# Altium PCB KickerTrigger.PcbDoc
Units mm, origin at the board's own origin, x right, y up, seen from the top; angles counter-clockwise.
Board outline 50.8 x 25.4 mm, 2 copper layers (Top Layer, Bottom Layer); 11 components, 8 nets, 30 pads, 19 vias.
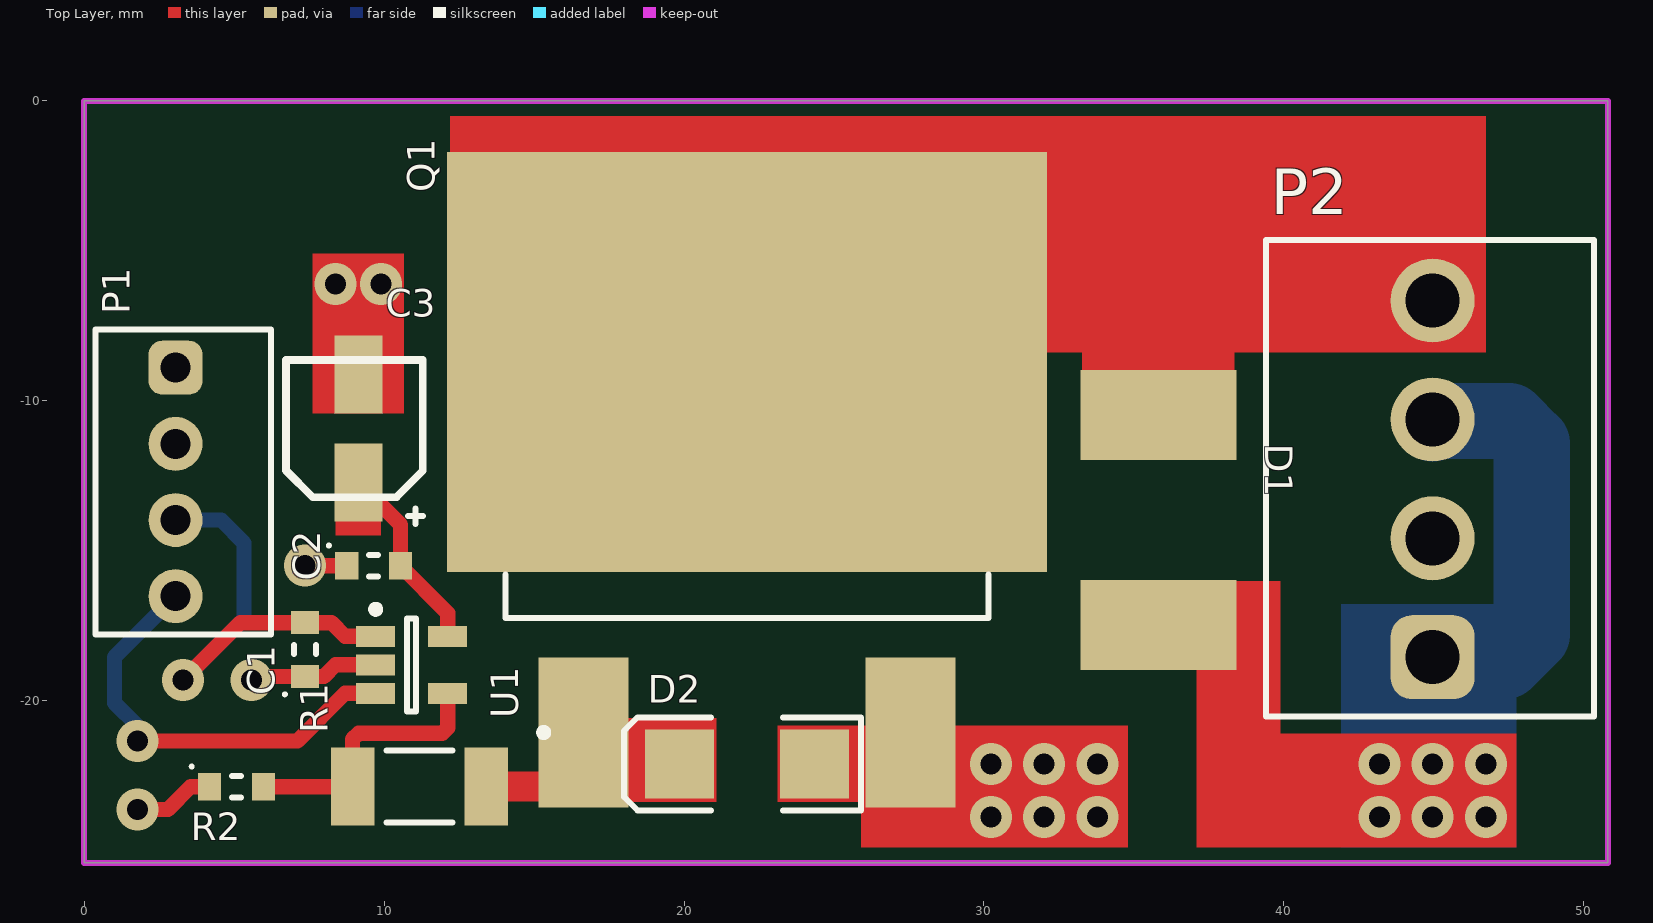
[diagram p0: Top Layer view]
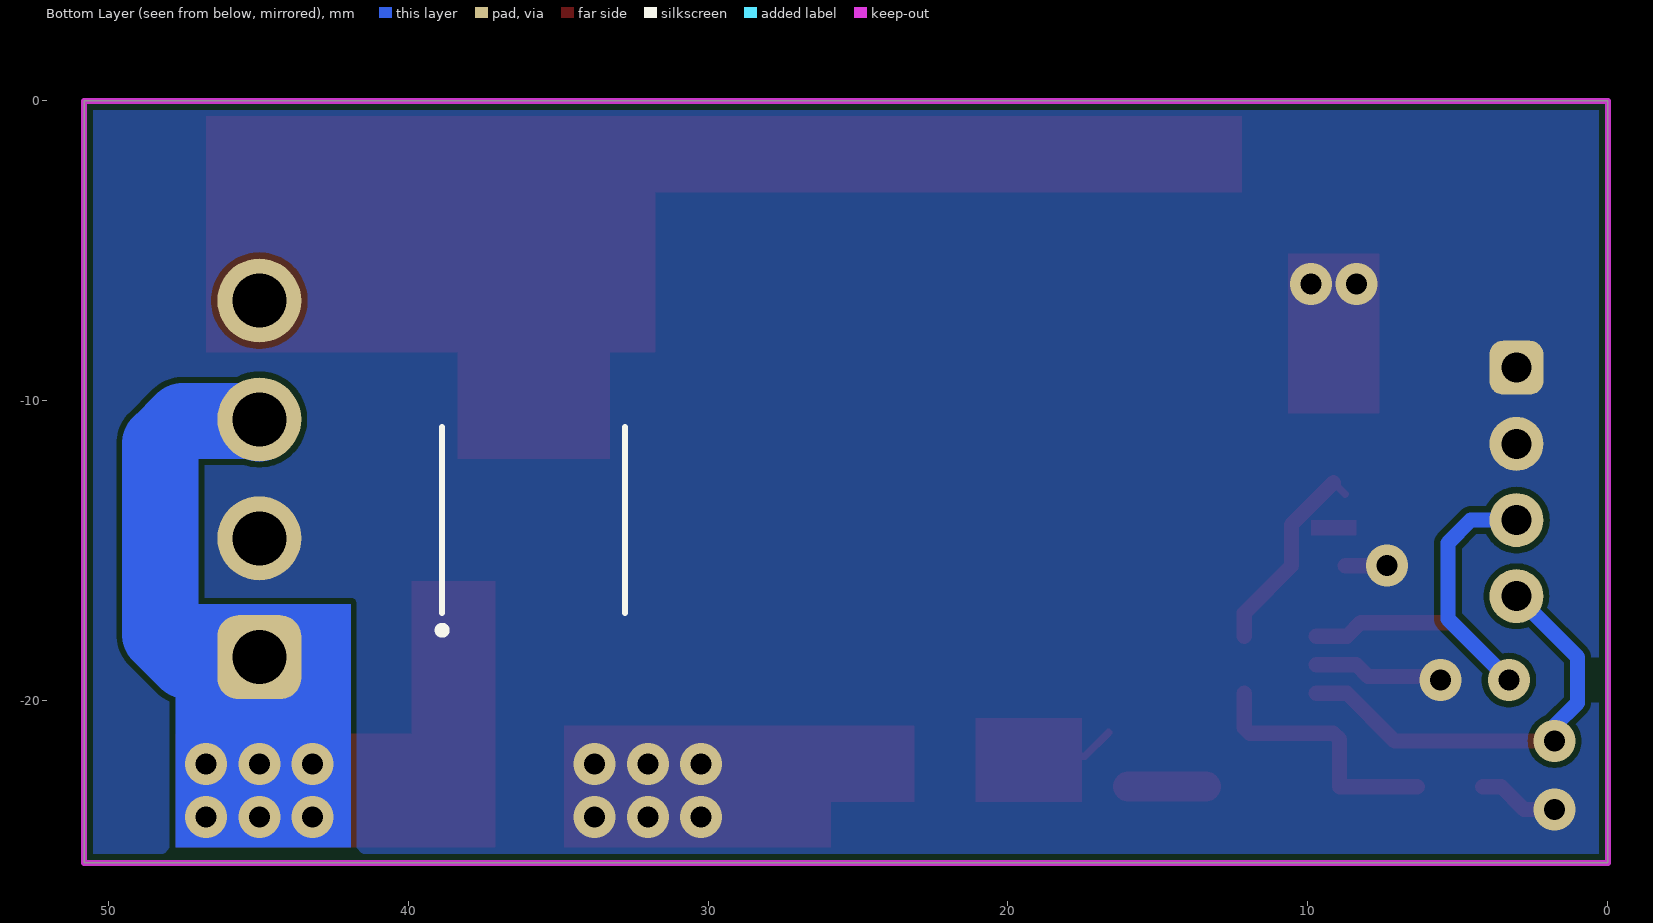
[diagram p1: Bottom Layer view, seen from below]
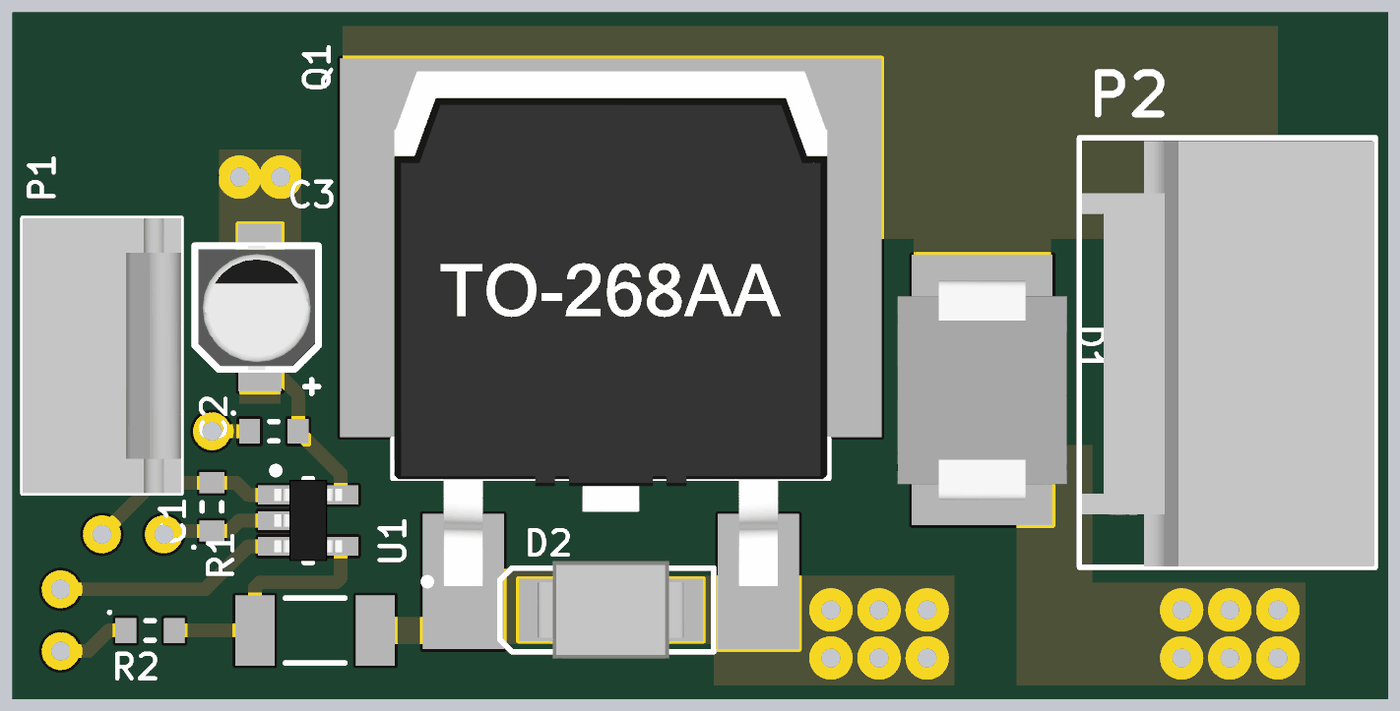
[diagram p2: 3D render of the assembled board from above, using the file's embedded part models]

## Layer stack, top to bottom
Top Solder: solder mask 0.0102, Solder Resist, Dk 3.5
Top Layer: signal copper 0.0356
Dielectric 1: dielectric 0.32, FR-4, Dk 4.8
Bottom Layer: signal copper 0.0356
Bottom Solder: solder mask 0.0102, Solder Resist, Dk 3.5

## Board outline
0,-25.4 50.8,-25.4 50.8,0 0,0

## Design rules (kind name [scope] priority, off if disabled: settings)
Clearance [All] p1: gap=0.203
PlaneClearance [All] p1: clearance=30
PlaneConnect [All] p1: planeconnectstyle=Relief reliefexpansion=0.254 reliefentries=4 reliefconductorwidth=0.508 reliefairgap=0.254
PolygonConnect [All] p1: connectstyle=Direct reliefconductorwidth=0.508 reliefentries=4 polygonreliefangle="90 Angle" airgapwidth=0.254
RoutingVias [All] p1: holewidth=0.7 width=1.4 viastyle="Through Hole" minholewidth=0.7 minwidth=1.4 maxholewidth=0.7 maxwidth=1.4
SolderMaskExpansion [All] p1: expansion=0.102
Width [All] p1: maxlimit=10 minlimit=0.254 preferedwidth=0.508
28 further rules are at their usual default settings.

## Components (designator, comment, footprint, x,y, rotation, side; value= is the part's Value field where it differs from the comment)
C1 "CL10B104KB8SFNC" 0603 7.366,-18.288 r90 top
C2 "CL10B104KB8SFNC" 0603 9.652,-15.494 r0 top
C3 "865230340001" "CAP 4.3x4.3mm" 9.144,-10.922 r270 top
D1 "S10M-TP" HSMC 35.814,-13.97 r270 top
D2 "15V, 3W" SMB 22.098,-22.098 r180 top
P1 "header 4pin 0.100" "0.100MIL 4PIN HEADER" 3.048,-8.89 r270 top
P2 "Header 4pin 0.156" "0.156mil 4pin header" 44.958,-18.542 r90 top
Q1 "IXFT94N30P3" TO-268 22.098,-12.954 r90 top
R1 "RMCP2010FT10R0" 2010 11.176,-22.86 r0 top
R2 "RC0603JR-0710KL" 0603 5.08,-22.86 r0 top
U1 "TPS2819DBVR" SOT-23-5 10.922,-18.796 r0 top

## Footprints (in the part's own frame and the unit in brackets; to place one, negate y for a bottom-side part, rotate by r counter-clockwise, add the part's x,y. Pads: shape width x height; smd on the part's side, far side on the other; paste and mask are expansions set on the pad)
"0.100MIL 4PIN HEADER" [mm]
  rrect50% 1.8x1.8 hole 1: 1(0,0)
  round 1.8 hole 1: 2(2.54,0) 3(5.08,0) 4(7.62,0)
  silkscreen extent -1.27,-2.67 8.89,3.18, body extent -1.27,-2.67 8.89,3.18, height 10.03
"0.156mil 4pin header" [mm]
  rrect50% 2.8x2.8 hole 1.8: 1(0,0)
  round 2.8 hole 1.8: 2(3.962,0) 3(7.925,0) 4(11.887,0)
  silkscreen extent -1.98,-5.38 13.9,5.55, body extent -1.95,-5.35 13.77,5.45, height 13.93
0603 [mm] "Chip 2-Leads, Body 1,60x0,80mm, IPC Medium Density"
  rect 0.77x0.92 smd: 1(-0.895,0) 2(0.895,0)
  silkscreen extent -1.54,-0.36 0.15,0.72, body extent -0.8,-0.4 0.8,0.4, height 1
2010 [mm] "Chip Resistor, 2-Leads, Body 5,00x2,45mm, IPC Medium Density"
  rect 1.45x2.6 smd: 1(-2.225,0) 2(2.225,0)
  silkscreen extent -1.1,-1.2 1.1,1.2, body extent -2.6,-1.3 2.6,1.3, height 0.6
"CAP 4.3x4.3mm" [mm] "Chip"
  rect 2.6x1.6 smd: 1(1.8,0) 2(-1.8,0)
  silkscreen extent -2.29,-2.41 3.17,2.16, body extent -2.29,-2.28 2.31,2.02, height 3.91
HSMC [mm]
  rect 3x5.2 smd: A(-3.5,0) K(3.5,0)
  body extent -4.06,-3.15 4.06,3.15, height 1.27
SMB [mm] "DO-214-AA/SMB; 2 C-Bend Leads; Body 5.3 x 3.6 mm, inc. leads (LxW)"
  rect 2.3x2.3 smd: A(-2.25,0) K(2.25,0)
  silkscreen extent -3.8,-1.55 4.1,1.55, body extent -2.7,-1.8 2.7,1.8, height 2.5
SOT-23-5 [mm]
  rect 1.3x0.7 smd: 1(-1.2,0.95) 2(-1.2,0) 3(-1.2,-0.95) 4(1.2,-0.95) 5(1.2,0.95)
  silkscreen extent -1.32,-1.55 0.15,1.97, body extent -1.25,-1.5 1.25,1.5, height 1.05
TO-268 [mm]
  rect 5x3 smd: 1(-8.1,5.45) 3(-8.1,-5.45)
  rect 14x20 smd: 2(4.25,0)
  silkscreen extent -8.22,-8.05 -2.83,8.05, body extent -8.27,-8 10.78,8, height 5.1

## Part data
C1 C2: "CAP CER 0.1UF 50V X7R 0603"
C3: "CAP 10 UF 20% 16 V"
D1: "DIODE GEN PURP 1KV 10A DO214AB"
D2: library part 3SMBJ5929B-TP, "DIODE ZENER 15V 3W DO214AA"
P1: "CONN HEADER VERT 4POS .100 TIN"
P2: "CONN HEADER VERT 4POS .156 TIN"
Q1: "MOSFET N-CH 300V 94A TO-268"
R1: "RES SMD 10 OHM 1% 1W 2010"
R2: "RES SMD 10K OHM 5% 1/10W 0603"
U1: "IC NONINVERT FET DRVR SOT-23-5"

## Via types
v1: diameter 1.4, hole 0.7, Top Layer to Bottom Layer, 19 vias

## Nets (pads, with @x,y where several pads share a name; then routed paths per layer and width w, separated by ;. In a path a pad name is that pad's centre, name@x,y a point inside that pad or via, vN(x,y) a via of type N, cw(c..) or ccw(c..) an arc to the next point about the centre after c; other vN are vias at no path point)
AGND: C1.1 C2.1 C3.2 D2.A P1.1 P1.2 P2.2 Q1.3 R2.1 U1.2 | length 17.9
  Top Layer w0.254: v1(5.588,-19.304) v1@5.709,-19.183 ; v1(8.382,-6.096) 8.382,-7.874 8.636,-8.128 8.636,-8.614 C3.2 C3.2@9.42,-9.398 ; C3.2@9.652,-8.128 9.906,-7.874 v1(9.906,-6.096) ; D2.A@24.348,-21.844 26.758,-21.844 Q1.3 ; v1@31.976,-23.396 v1@32.004,-23.368
  Top Layer w0.508: v1(1.778,-23.622) 2.794,-23.622 3.556,-22.86 R2.1 ; v1@5.709,-19.183 7.995,-19.183 8.382,-18.796 U1.2 ; v1(7.366,-15.494) C2.1
  other v1: 30.226,-23.876 32.004,-23.876 33.782,-23.876 30.226,-22.098 32.004,-22.098 33.782,-22.098
GATE: D2.K Q1.1 R1.2 | length 6.1
  Top Layer w0.254: Q1.1 17.438,-21.844 D2.K@19.848,-21.844
  Top Layer w1: R1.2 Q1.1@16.002,-22.86
KICK: P1.4 U1.3 | length 14.6
  Top Layer w0.508: v1(1.778,-21.336) 7.112,-21.336 8.702,-19.746 U1.3
  Bottom Layer w0.254: v1(1.778,-21.336) v1@1.778,-20.828
  Bottom Layer w0.508: v1@1.778,-20.828 1.016,-20.066 1.016,-18.542 P1.4
OUT: R1.1 R2.2 U1.4 | length 8.7
  Top Layer w0.508: R2.2@6.35,-22.86 R1.1 8.951,-21.275 9.144,-21.082 11.938,-21.082 12.122,-20.898 U1.4
S+: D1.K P2.1 P2.3 | length 15
  Top Layer w0.254: 44.958,-22.86 v1(44.958,-22.098)
  Bottom Layer w0.254: v1@44.704,-22.606 44.958,-22.352 v1(44.958,-22.098) ; P2.1@44.958,-18.669 47.371,-18.669
  Bottom Layer w2.54: P2.3@44.958,-10.744 45.034,-10.668 47.498,-10.668 48.26,-11.43 48.26,-17.78 47.371,-18.669
  other v1: 43.18,-23.876 44.958,-23.876 46.736,-23.876 43.18,-22.098 46.736,-22.098
S-: D1.A P2.4 Q1.2 | length 1.5
  Top Layer w0.254: D1.A@34.742,-10.414 D1.A@35.814,-11.486
VPOWER: C1.2 P1.3 U1.1 | length 15.4
  Top Layer w0.508: v1(3.302,-19.304) 5.213,-17.393 C1.2 8.249,-17.393 8.702,-17.846 U1.1
  Bottom Layer w0.508: P1.3 4.572,-13.97 5.334,-14.732 5.334,-17.272 v1(3.302,-19.304)
VREG: C2.2 C3.1 U1.5 | length 7
  Top Layer w0.254: C3.1@8.757,-13.109 C3.1 ; U1.5 U1.5@12.192,-17.776
  Top Layer w0.508: C3.1 10.547,-14.125 C2.2 12.122,-17.069 U1.5

## Polygon pours and split planes (outlines as drawn)
AGND on Bottom Layer "GND_PLANE" (solid, remove dead copper, pour order 2): 0,0 0,-25.146 0.254,-25.4 50.8,-25.4 50.8,0

## Keep-outs
Keep-Out Layer:
  the board outline again, w0.2

## Other copper
Top Layer:
  rectangle net S-: 33.274,-11.938 38.354,-7.62
  rectangle net S-: 31.75,-8.382 46.736,-0.508
  rectangle net AGND: 23.114,-23.368 27.178,-20.828
  rectangle net S-: 12.192,-3.048 32.004,-0.508
  rectangle net S+: 37.084,-24.892 39.878,-16.002
  rectangle net S+: 37.084,-24.892 47.752,-21.082
  rectangle net VREG: 8.382,-14.478 9.906,-13.97
  rectangle net AGND: 7.62,-10.414 10.668,-5.08
  rectangle net GATE: 17.526,-23.368 21.082,-20.574
  rectangle net AGND: 25.908,-24.892 34.798,-20.828
Bottom Layer:
  rectangle net S+: 41.91,-24.892 47.752,-16.764

## Silkscreen, mask and mechanical layers (free items; w line width, h text height)
Text:
  text "Kicker" at 1.016,-3.302 h2
  text "V2" at 1.016,-6.096 h2